# EAGLE board Nav Switch v2 (EAGLE 6.5.0)
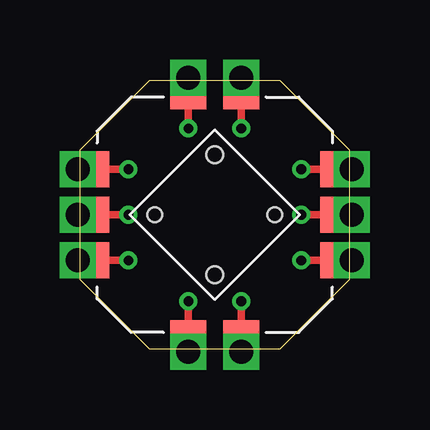
[diagram p0: board, top side]
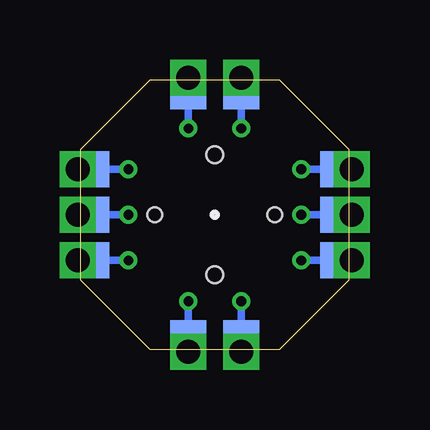
[diagram p1: board, bottom side, seen from below]

Size 11.2 x 11.2 mm. Coordinates in mm from the lower left corner, seen from the top.
Outline: 0,8.3 2.9,11.2 8.3,11.2 11.2,8.3 11.2,2.9 8.3,0 2.9,0 0,2.9 0,8.3
Copper layers (1*16): Top 0.0356mm / dielectric 1.5011mm / Bottom 0.0356mm
Design rules "LaenPCBOrder *": minimum track width 6mil, minimum drill 13mil, track to track 6mil, track to pad 6mil, pad to pad 6mil, via to via 6mil, smd to smd 6mil, copper to edge 15mil, drill to drill 6mil, minimum pad ring 7mil, minimum via ring 7mil, stop-mask expansion 0mil, vias tented up to drill 30mil, thermal gap 10mil

## Footprints (pad centres in the part's own frame; a part is rotated, then mirrored left to right if it is on the bottom)
JOYSTICK-NOKIA-3230-LONG-PAD = smd 1.8 x 1.5 rotated 315: 1 -2.404,5.091; 2 -5.091,2.404; 3 2.404,-5.091; 4 5.091,-2.404; 5 -3.748,3.748; E 3.748,-3.748 | smd 1.5 x 1.8 rotated 315: A 2.97,4.525; B -4.525,-2.97; C -2.97,-4.525; D 4.525,2.97 | hole 0.7: 1.768,1.768; -1.768,-1.768 | hole 0.6: -1.768,1.768; 1.768,-1.768
JOYSTICK-NOKIA-3230-LONG-PAD(BACKSIDE) = smd 1.8 x 1.5 rotated 315 bottom: 1 -2.404,5.091; 2 -5.091,2.404; 3 2.404,-5.091; 4 5.091,-2.404; 5 -3.748,3.748; E 3.748,-3.748 | smd 1.5 x 1.8 rotated 315 bottom: A 2.97,4.525; B -4.525,-2.97; C -2.97,-4.525; D 4.525,2.97

## Placement (x,y rotation side)
U$1  SWITCH-NAVIGATIONLONG-PAD  [JOYSTICK-NOKIA-3230-LONG-PAD]  5.6,5.6 45 top
U$2  SWITCH-NAVIGATIONLONG-BACK  [JOYSTICK-NOKIA-3230-LONG-PAD(BACKSIDE)]  5.6,5.6 45 top

## Library data of the parts
U$1 U$2 = Jianan Li

## Nets
N$1: U$1.A U$2.A
N$2: U$1.1 U$2.1
N$3: U$1.B U$2.B
N$4: U$1.2 U$2.2
N$5: U$1.C U$2.C
N$6: U$1.3 U$2.3
N$7: U$1.D U$2.D
N$8: U$1.4 U$2.4
N$9: U$1.E U$2.E
N$10: U$1.5 U$2.5

## Tracks (layer width: path | path; a pad name or v marks a point on that pad's centre or on a via)
N$1  (via drill 0.4)
  Top 0.305: U$2.A | U$2.A v4.5,9.2
  Bottom 0.305: v4.5,9.2 | v4.5,9.2 U$2.A
N$2  (via drill 0.4)
  Top 0.305: v2,7.5 U$2.1 | U$2.1
  Bottom 0.305: U$2.1 v2,7.5 | v2,7.5
N$3  (via drill 0.4)
  Top 0.305: v4.5,2 | v4.5,2 U$2.B
  Bottom 0.305: U$2.B | U$2.B v4.5,2
N$4  (via drill 0.4)
  Top 0.305: U$1.2 v2,3.7 | v2,3.7
  Bottom 0.305: v2,3.7 U$1.2 | U$1.2
N$5  (via drill 0.4)
  Top 0.305: U$2.C | U$2.C v6.7,2
  Bottom 0.305: v6.7,2 | v6.7,2 U$2.C
N$6  (via drill 0.4)
  Top 0.305: U$1.3 v9.2,3.7
  Bottom 0.305: v9.2,3.7 U$1.3
N$7  (via drill 0.4)
  Top 0.305: v6.7,9.2 | v6.7,9.2 U$2.D
  Bottom 0.305: U$2.D | U$2.D v6.7,9.2
N$8  (via drill 0.4)
  Top 0.305: v9.2,7.5 U$1.4 | U$1.4
  Bottom 0.305: U$1.4 v9.2,7.5 | v9.2,7.5
N$9  (via drill 0.4)
  Top 0.305: U$2.E v9.2,5.6
  Bottom 0.305: v9.2,5.6 U$2.E
N$10  (via drill 0.4)
  Top 0.305: v2,5.6 U$1.5
  Bottom 0.305: U$1.5 v2,5.6
N$11  (via drill 1)
  other vias: -0.1,5.6
N$12  (via drill 1)
  other vias: -0.1,3.7
N$13  (via drill 1)
  other vias: 11.3,7.5
N$14  (via drill 1)
  other vias: -0.1,7.5
N$15  (via drill 1)
  other vias: 11.3,5.6
N$16  (via drill 1)
  other vias: 11.3,3.7
N$17  (via drill 1)
  other vias: 6.7,-0.1
N$18  (via drill 1)
  other vias: 4.5,-0.1
N$19  (via drill 1)
  other vias: 6.7,11.3
N$20  (via drill 1)
  other vias: 4.5,11.3